# EAGLE board RedBot Accelerometer-Panel-v12a (EAGLE 7.4.0), part 1 of 8
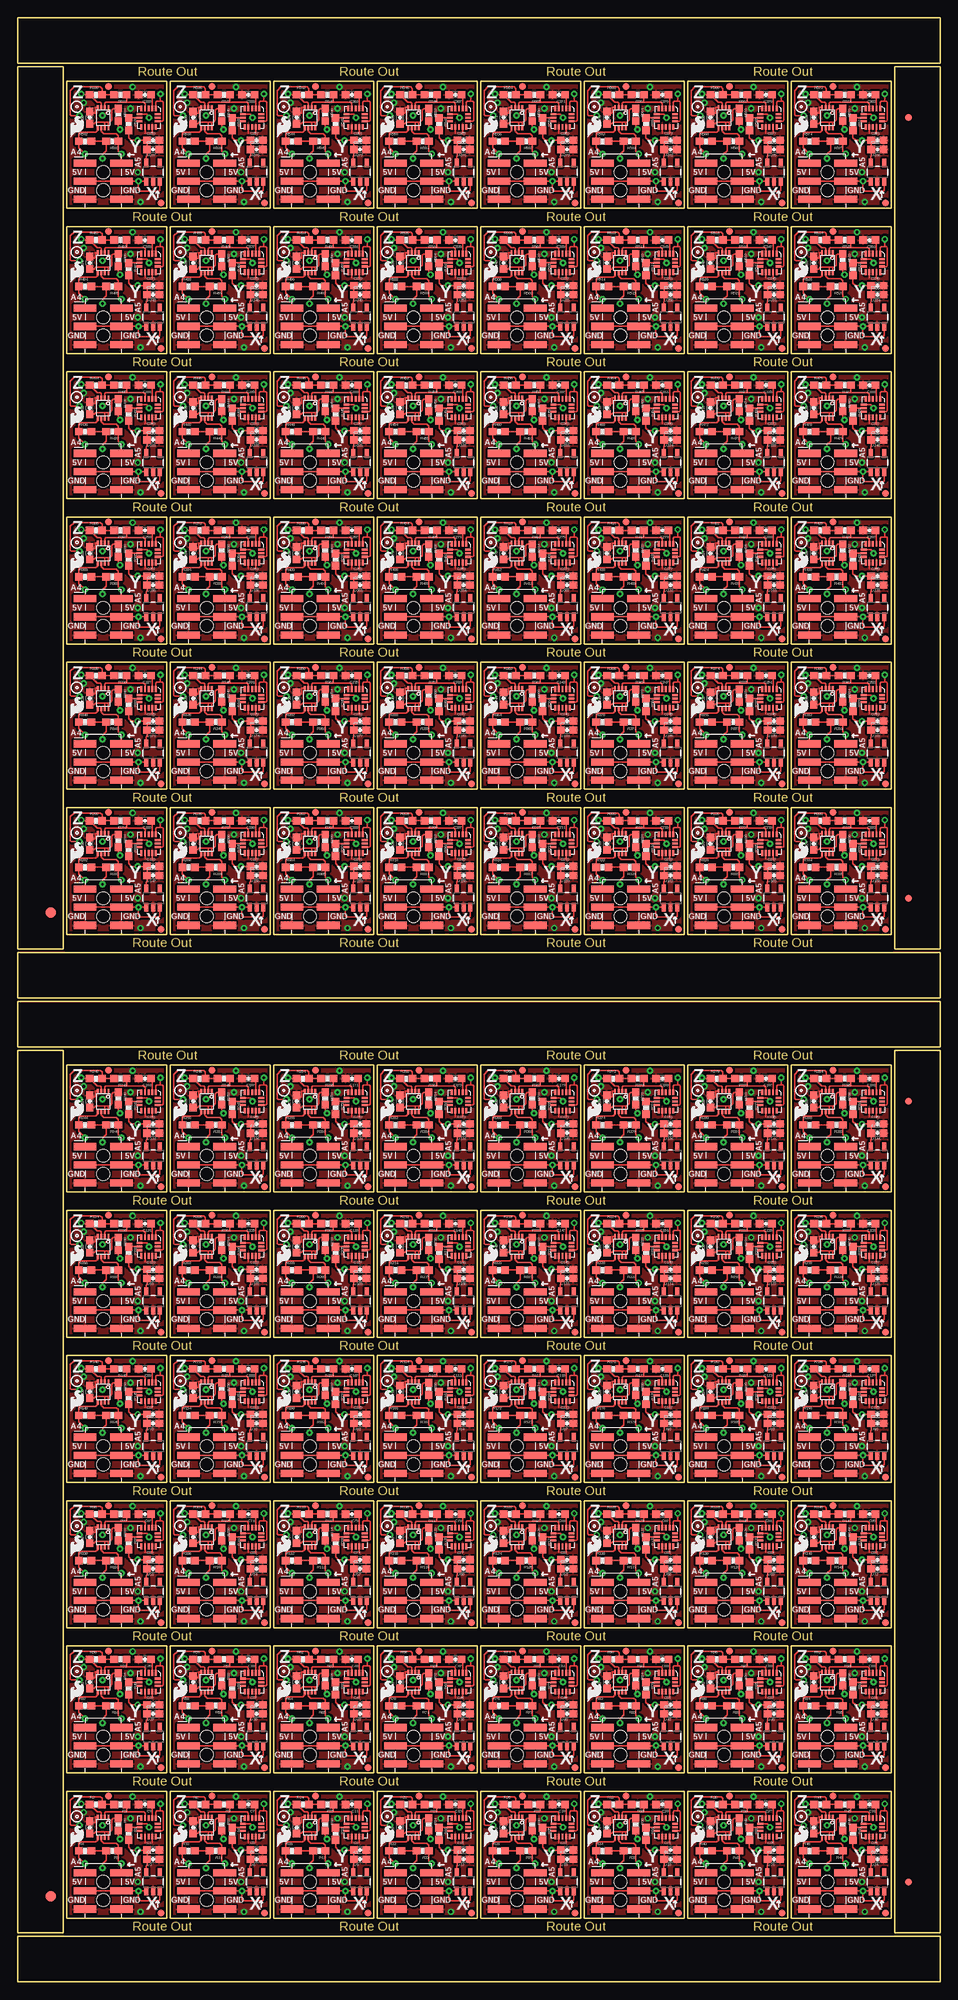
[diagram p0: board, top side]
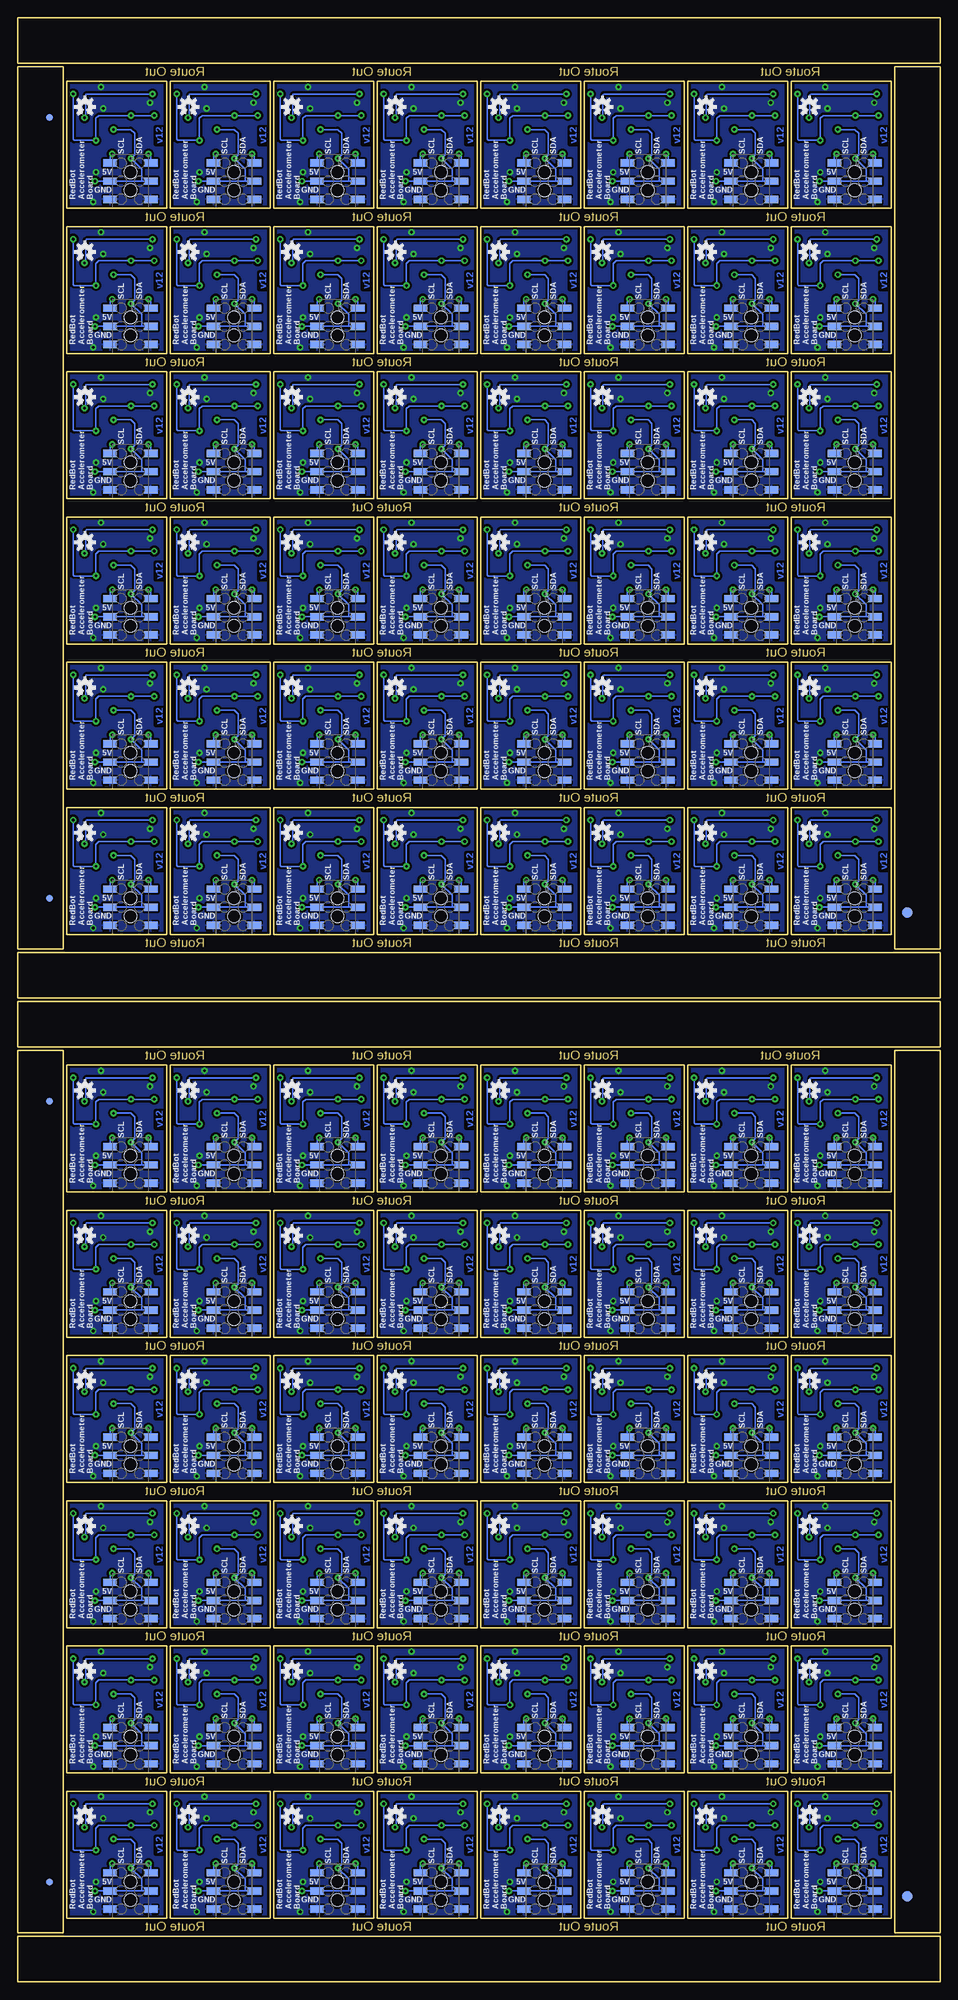
[diagram p1: board, bottom side, seen from below]

Size 129.03 x 274.83 mm. Coordinates in mm from the lower left corner, seen from the top.
Outline: 416 segments
Copper layers (1*16): Top 0.035mm / dielectric 1.5mm / Bottom 0.035mm
Design rules "SparkFun-2-layer": minimum track width 7mil, minimum drill 15mil, track to track 8mil, track to pad 8mil, pad to pad 8mil, via to via 8mil, smd to smd 8mil, copper to edge 8mil, drill to drill 8mil, minimum pad ring 12mil, minimum via ring 10mil, stop-mask expansion 4mil, vias tented up to drill 20mil, thermal gap 10mil

## Footprints (pad centres in the part's own frame; a part is rotated, then mirrored left to right if it is on the bottom)
0603-CAP = smd 1.1 x 1: 1 -0.85,0; 2 0.85,0
FIDUCIAL-1.5X3 = smd 1.5 x 1.5: 1 0,0
FIDUCIAL-1X2 = smd 1 x 1: 1 0,0
2X3_SMT_POSTS = smd 1 x 3.17: 1 -2.54,-2.54; 2 -2.54,2.54; 3 0,-2.54; 4 0,2.54; 5 2.54,-2.54; 6 2.54,2.54 | hole 1.8: -1.27,0; 1.27,0
2X3_SMD = smd 1.02 x 1.9: 1 -2.54,-2.85; 2 -2.54,2.85; 3 0,-2.85; 4 0,2.85; 5 2.54,-2.85; 6 2.54,2.85
0603-RES = smd 1.1 x 1: 1 -0.85,0; 2 0.85,0
MMA8452Q-1:1 = smd 0.8 x 0.275: 1 -1.3,1; 2 -1.3,0.5; 3 -1.3,0; 4 -1.3,-0.5; 5 -1.3,-1; 9 1.3,-1; 10 1.3,-0.5; 11 1.3,0; 12 1.3,0.5; 13 1.3,1 | smd 0.29 x 0.8: 6 -0.5,-1.275; 7 0,-1.275; 8 0.5,-1.275; 14 0.5,1.275; 15 0,1.275; 16 -0.5,1.275
SOT23-5 = smd 0.55 x 1.2: 1 -0.95,-1.3; 2 0,-1.3; 3 0.95,-1.3; 4 0.95,1.3; 5 -0.95,1.3
PCA9306DC-1:1 = smd 0.25 x 0.602: 1 -0.73,-1.446; 2 -0.23,-1.446; 3 0.27,-1.446; 4 0.77,-1.446; 5 0.77,1.431; 6 0.27,1.431; 7 -0.23,1.431; 8 -0.73,1.431

## Placement (x,y rotation side)
C1  0.1uF  [0603-CAP]  18.92,18.41 0 top
C2  4.7uF  [0603-CAP]  18.92,17.14 0 top
C3  0.1uF  [0603-CAP]  17.78,24.79 180 top
C4  0.1uF  [0603-CAP]  10.03,21.59 90 top
C5  0.1uF  [0603-CAP]  33.4,18.41 0 top
C6  4.7uF  [0603-CAP]  33.4,17.14 0 top
C7  0.1uF  [0603-CAP]  32.26,24.79 180 top
C8  0.1uF  [0603-CAP]  24.51,21.59 90 top
C9  0.1uF  [0603-CAP]  47.88,18.41 0 top
C10  4.7uF  [0603-CAP]  47.88,17.14 0 top
C11  0.1uF  [0603-CAP]  46.74,24.79 180 top
C12  0.1uF  [0603-CAP]  38.99,21.59 90 top
C13  0.1uF  [0603-CAP]  62.36,18.41 0 top
C14  4.7uF  [0603-CAP]  62.36,17.14 0 top
C15  0.1uF  [0603-CAP]  61.21,24.79 180 top
C16  0.1uF  [0603-CAP]  53.47,21.59 90 top
C17  0.1uF  [0603-CAP]  76.83,18.41 0 top
C18  4.7uF  [0603-CAP]  76.83,17.14 0 top
C19  0.1uF  [0603-CAP]  75.69,24.79 180 top
C20  0.1uF  [0603-CAP]  67.94,21.59 90 top
C21  0.1uF  [0603-CAP]  91.31,18.41 0 top
C22  4.7uF  [0603-CAP]  91.31,17.14 0 top
C23  0.1uF  [0603-CAP]  90.17,24.79 180 top
C24  0.1uF  [0603-CAP]  82.42,21.59 90 top
C25  0.1uF  [0603-CAP]  105.79,18.41 0 top
C26  4.7uF  [0603-CAP]  105.79,17.14 0 top
C27  0.1uF  [0603-CAP]  104.65,24.79 180 top
C28  0.1uF  [0603-CAP]  96.9,21.59 90 top
C29  0.1uF  [0603-CAP]  120.27,18.41 0 top
C30  4.7uF  [0603-CAP]  120.27,17.14 0 top
C31  0.1uF  [0603-CAP]  119.13,24.79 180 top
C32  0.1uF  [0603-CAP]  111.38,21.59 90 top
C33  0.1uF  [0603-CAP]  18.92,38.73 0 top
C34  4.7uF  [0603-CAP]  18.92,37.47 0 top
C35  0.1uF  [0603-CAP]  17.78,45.11 180 top
C36  0.1uF  [0603-CAP]  10.03,41.91 90 top
C37  0.1uF  [0603-CAP]  33.4,38.73 0 top
C38  4.7uF  [0603-CAP]  33.4,37.47 0 top
C39  0.1uF  [0603-CAP]  32.26,45.11 180 top
C40  0.1uF  [0603-CAP]  24.51,41.91 90 top
C41  0.1uF  [0603-CAP]  47.88,38.73 0 top
C42  4.7uF  [0603-CAP]  47.88,37.47 0 top
C43  0.1uF  [0603-CAP]  46.74,45.11 180 top
C44  0.1uF  [0603-CAP]  38.99,41.91 90 top
C45  0.1uF  [0603-CAP]  62.36,38.73 0 top
C46  4.7uF  [0603-CAP]  62.36,37.47 0 top
C47  0.1uF  [0603-CAP]  61.21,45.11 180 top
C48  0.1uF  [0603-CAP]  53.47,41.91 90 top
C49  0.1uF  [0603-CAP]  76.83,38.73 0 top
C50  4.7uF  [0603-CAP]  76.83,37.47 0 top
C51  0.1uF  [0603-CAP]  75.69,45.11 180 top
C52  0.1uF  [0603-CAP]  67.94,41.91 90 top
C53  0.1uF  [0603-CAP]  91.31,38.73 0 top
C54  4.7uF  [0603-CAP]  91.31,37.47 0 top
C55  0.1uF  [0603-CAP]  90.17,45.11 180 top
C56  0.1uF  [0603-CAP]  82.42,41.91 90 top
C57  0.1uF  [0603-CAP]  105.79,38.73 0 top
C58  4.7uF  [0603-CAP]  105.79,37.47 0 top
C59  0.1uF  [0603-CAP]  104.65,45.11 180 top
C60  0.1uF  [0603-CAP]  96.9,41.91 90 top
C61  0.1uF  [0603-CAP]  120.27,38.73 0 top
C62  4.7uF  [0603-CAP]  120.27,37.47 0 top
C63  0.1uF  [0603-CAP]  119.13,45.11 180 top
C64  0.1uF  [0603-CAP]  111.38,41.91 90 top
C65  0.1uF  [0603-CAP]  18.92,59.05 0 top
C66  4.7uF  [0603-CAP]  18.92,57.78 0 top
C67  0.1uF  [0603-CAP]  17.78,65.43 180 top
C68  0.1uF  [0603-CAP]  10.03,62.23 90 top
C69  0.1uF  [0603-CAP]  33.4,59.05 0 top
C70  4.7uF  [0603-CAP]  33.4,57.78 0 top
C71  0.1uF  [0603-CAP]  32.26,65.43 180 top
C72  0.1uF  [0603-CAP]  24.51,62.23 90 top
C73  0.1uF  [0603-CAP]  47.88,59.05 0 top
C74  4.7uF  [0603-CAP]  47.88,57.78 0 top
C75  0.1uF  [0603-CAP]  46.74,65.43 180 top
C76  0.1uF  [0603-CAP]  38.99,62.23 90 top
C77  0.1uF  [0603-CAP]  62.36,59.05 0 top
C78  4.7uF  [0603-CAP]  62.36,57.78 0 top
C79  0.1uF  [0603-CAP]  61.21,65.43 180 top
C80  0.1uF  [0603-CAP]  53.47,62.23 90 top
C81  0.1uF  [0603-CAP]  76.83,59.05 0 top
C82  4.7uF  [0603-CAP]  76.83,57.78 0 top
C83  0.1uF  [0603-CAP]  75.69,65.43 180 top
C84  0.1uF  [0603-CAP]  67.94,62.23 90 top
C85  0.1uF  [0603-CAP]  91.31,59.05 0 top
C86  4.7uF  [0603-CAP]  91.31,57.78 0 top
C87  0.1uF  [0603-CAP]  90.17,65.43 180 top
C88  0.1uF  [0603-CAP]  82.42,62.23 90 top
C89  0.1uF  [0603-CAP]  105.79,59.05 0 top
C90  4.7uF  [0603-CAP]  105.79,57.78 0 top
C91  0.1uF  [0603-CAP]  104.65,65.43 180 top
C92  0.1uF  [0603-CAP]  96.9,62.23 90 top
C93  0.1uF  [0603-CAP]  120.27,59.05 0 top
C94  4.7uF  [0603-CAP]  120.27,57.78 0 top
C95  0.1uF  [0603-CAP]  119.13,65.43 180 top
C96  0.1uF  [0603-CAP]  111.38,62.23 90 top
C97  0.1uF  [0603-CAP]  18.92,79.38 0 top
C98  4.7uF  [0603-CAP]  18.92,78.11 0 top
C99  0.1uF  [0603-CAP]  17.78,85.75 180 top
C100  0.1uF  [0603-CAP]  10.03,82.55 90 top
C101  0.1uF  [0603-CAP]  33.4,79.38 0 top
C102  4.7uF  [0603-CAP]  33.4,78.11 0 top
C103  0.1uF  [0603-CAP]  32.26,85.75 180 top
C104  0.1uF  [0603-CAP]  24.51,82.55 90 top
C105  0.1uF  [0603-CAP]  47.88,79.38 0 top
C106  4.7uF  [0603-CAP]  47.88,78.11 0 top
C107  0.1uF  [0603-CAP]  46.74,85.75 180 top
C108  0.1uF  [0603-CAP]  38.99,82.55 90 top
C109  0.1uF  [0603-CAP]  62.36,79.38 0 top
C110  4.7uF  [0603-CAP]  62.36,78.11 0 top
C111  0.1uF  [0603-CAP]  61.21,85.75 180 top
C112  0.1uF  [0603-CAP]  53.47,82.55 90 top
C113  0.1uF  [0603-CAP]  76.83,79.38 0 top
C114  4.7uF  [0603-CAP]  76.83,78.11 0 top
C115  0.1uF  [0603-CAP]  75.69,85.75 180 top
C116  0.1uF  [0603-CAP]  67.94,82.55 90 top
C117  0.1uF  [0603-CAP]  91.31,79.38 0 top
C118  4.7uF  [0603-CAP]  91.31,78.11 0 top
C119  0.1uF  [0603-CAP]  90.17,85.75 180 top
C120  0.1uF  [0603-CAP]  82.42,82.55 90 top
C121  0.1uF  [0603-CAP]  105.79,79.38 0 top
C122  4.7uF  [0603-CAP]  105.79,78.11 0 top
C123  0.1uF  [0603-CAP]  104.65,85.75 180 top
C124  0.1uF  [0603-CAP]  96.9,82.55 90 top
C125  0.1uF  [0603-CAP]  120.27,79.38 0 top
C126  4.7uF  [0603-CAP]  120.27,78.11 0 top
C127  0.1uF  [0603-CAP]  119.13,85.75 180 top
C128  0.1uF  [0603-CAP]  111.38,82.55 90 top
C129  0.1uF  [0603-CAP]  18.92,99.69 0 top
C130  4.7uF  [0603-CAP]  18.92,98.42 0 top
C131  0.1uF  [0603-CAP]  17.78,106.07 180 top
C132  0.1uF  [0603-CAP]  10.03,102.87 90 top
C133  0.1uF  [0603-CAP]  33.4,99.69 0 top
C134  4.7uF  [0603-CAP]  33.4,98.42 0 top
C135  0.1uF  [0603-CAP]  32.26,106.07 180 top
C136  0.1uF  [0603-CAP]  24.51,102.87 90 top
C137  0.1uF  [0603-CAP]  47.88,99.69 0 top
C138  4.7uF  [0603-CAP]  47.88,98.42 0 top
C139  0.1uF  [0603-CAP]  46.74,106.07 180 top
C140  0.1uF  [0603-CAP]  38.99,102.87 90 top
C141  0.1uF  [0603-CAP]  62.36,99.69 0 top
C142  4.7uF  [0603-CAP]  62.36,98.42 0 top
C143  0.1uF  [0603-CAP]  61.21,106.07 180 top
C144  0.1uF  [0603-CAP]  53.47,102.87 90 top
C145  0.1uF  [0603-CAP]  76.83,99.69 0 top
C146  4.7uF  [0603-CAP]  76.83,98.42 0 top
C147  0.1uF  [0603-CAP]  75.69,106.07 180 top
C148  0.1uF  [0603-CAP]  67.94,102.87 90 top
C149  0.1uF  [0603-CAP]  91.31,99.69 0 top
C150  4.7uF  [0603-CAP]  91.31,98.42 0 top
C151  0.1uF  [0603-CAP]  90.17,106.07 180 top
C152  0.1uF  [0603-CAP]  82.42,102.87 90 top
C153  0.1uF  [0603-CAP]  105.79,99.69 0 top
C154  4.7uF  [0603-CAP]  105.79,98.42 0 top
C155  0.1uF  [0603-CAP]  104.65,106.07 180 top
C156  0.1uF  [0603-CAP]  96.9,102.87 90 top
C157  0.1uF  [0603-CAP]  120.27,99.69 0 top
C158  4.7uF  [0603-CAP]  120.27,98.42 0 top
C159  0.1uF  [0603-CAP]  119.13,106.07 180 top
C160  0.1uF  [0603-CAP]  111.38,102.87 90 top
C161  0.1uF  [0603-CAP]  18.92,120.02 0 top
C162  4.7uF  [0603-CAP]  18.92,118.75 0 top
C163  0.1uF  [0603-CAP]  17.78,126.39 180 top
C164  0.1uF  [0603-CAP]  10.03,123.19 90 top
C165  0.1uF  [0603-CAP]  33.4,120.02 0 top
C166  4.7uF  [0603-CAP]  33.4,118.75 0 top
C167  0.1uF  [0603-CAP]  32.26,126.39 180 top
C168  0.1uF  [0603-CAP]  24.51,123.19 90 top
C169  0.1uF  [0603-CAP]  47.88,120.02 0 top
C170  4.7uF  [0603-CAP]  47.88,118.75 0 top
C171  0.1uF  [0603-CAP]  46.74,126.39 180 top
C172  0.1uF  [0603-CAP]  38.99,123.19 90 top
C173  0.1uF  [0603-CAP]  62.36,120.02 0 top
C174  4.7uF  [0603-CAP]  62.36,118.75 0 top
C175  0.1uF  [0603-CAP]  61.21,126.39 180 top
C176  0.1uF  [0603-CAP]  53.47,123.19 90 top
C177  0.1uF  [0603-CAP]  76.83,120.02 0 top
C178  4.7uF  [0603-CAP]  76.83,118.75 0 top
C179  0.1uF  [0603-CAP]  75.69,126.39 180 top
C180  0.1uF  [0603-CAP]  67.94,123.19 90 top
C181  0.1uF  [0603-CAP]  91.31,120.02 0 top
C182  4.7uF  [0603-CAP]  91.31,118.75 0 top
C183  0.1uF  [0603-CAP]  90.17,126.39 180 top
C184  0.1uF  [0603-CAP]  82.42,123.19 90 top
C185  0.1uF  [0603-CAP]  105.79,120.02 0 top
C186  4.7uF  [0603-CAP]  105.79,118.75 0 top
C187  0.1uF  [0603-CAP]  104.65,126.39 180 top
C188  0.1uF  [0603-CAP]  96.9,123.19 90 top
C189  0.1uF  [0603-CAP]  120.27,120.02 0 top
C190  4.7uF  [0603-CAP]  120.27,118.75 0 top
C191  0.1uF  [0603-CAP]  119.13,126.39 180 top
C192  0.1uF  [0603-CAP]  111.38,123.19 90 top
C193  0.1uF  [0603-CAP]  18.92,156.08 0 top
C194  4.7uF  [0603-CAP]  18.92,154.81 0 top
C195  0.1uF  [0603-CAP]  17.78,162.46 180 top
C196  0.1uF  [0603-CAP]  10.03,159.26 90 top
C197  0.1uF  [0603-CAP]  33.4,156.08 0 top
C198  4.7uF  [0603-CAP]  33.4,154.81 0 top
C199  0.1uF  [0603-CAP]  32.26,162.46 180 top
C200  0.1uF  [0603-CAP]  24.51,159.26 90 top
C201  0.1uF  [0603-CAP]  47.88,156.08 0 top
C202  4.7uF  [0603-CAP]  47.88,154.81 0 top
C203  0.1uF  [0603-CAP]  46.74,162.46 180 top
C204  0.1uF  [0603-CAP]  38.99,159.26 90 top
C205  0.1uF  [0603-CAP]  62.36,156.08 0 top
C206  4.7uF  [0603-CAP]  62.36,154.81 0 top
C207  0.1uF  [0603-CAP]  61.21,162.46 180 top
C208  0.1uF  [0603-CAP]  53.47,159.26 90 top
C209  0.1uF  [0603-CAP]  76.83,156.08 0 top
C210  4.7uF  [0603-CAP]  76.83,154.81 0 top
C211  0.1uF  [0603-CAP]  75.69,162.46 180 top
C212  0.1uF  [0603-CAP]  67.94,159.26 90 top
C213  0.1uF  [0603-CAP]  91.31,156.08 0 top
C214  4.7uF  [0603-CAP]  91.31,154.81 0 top
C215  0.1uF  [0603-CAP]  90.17,162.46 180 top
C216  0.1uF  [0603-CAP]  82.42,159.26 90 top
C217  0.1uF  [0603-CAP]  105.79,156.08 0 top
C218  4.7uF  [0603-CAP]  105.79,154.81 0 top
C219  0.1uF  [0603-CAP]  104.65,162.46 180 top
C220  0.1uF  [0603-CAP]  96.9,159.26 90 top
C221  0.1uF  [0603-CAP]  120.27,156.08 0 top
C222  4.7uF  [0603-CAP]  120.27,154.81 0 top
C223  0.1uF  [0603-CAP]  119.13,162.46 180 top
C224  0.1uF  [0603-CAP]  111.38,159.26 90 top
C225  0.1uF  [0603-CAP]  18.92,176.4 0 top
C226  4.7uF  [0603-CAP]  18.92,175.13 0 top
C227  0.1uF  [0603-CAP]  17.78,182.78 180 top
C228  0.1uF  [0603-CAP]  10.03,179.58 90 top
C229  0.1uF  [0603-CAP]  33.4,176.4 0 top
C230  4.7uF  [0603-CAP]  33.4,175.13 0 top
C231  0.1uF  [0603-CAP]  32.26,182.78 180 top
C232  0.1uF  [0603-CAP]  24.51,179.58 90 top
C233  0.1uF  [0603-CAP]  47.88,176.4 0 top
C234  4.7uF  [0603-CAP]  47.88,175.13 0 top
C235  0.1uF  [0603-CAP]  46.74,182.78 180 top
C236  0.1uF  [0603-CAP]  38.99,179.58 90 top
C237  0.1uF  [0603-CAP]  62.36,176.4 0 top
C238  4.7uF  [0603-CAP]  62.36,175.13 0 top
C239  0.1uF  [0603-CAP]  61.21,182.78 180 top
C240  0.1uF  [0603-CAP]  53.47,179.58 90 top
C241  0.1uF  [0603-CAP]  76.83,176.4 0 top
C242  4.7uF  [0603-CAP]  76.83,175.13 0 top
C243  0.1uF  [0603-CAP]  75.69,182.78 180 top
C244  0.1uF  [0603-CAP]  67.94,179.58 90 top
C245  0.1uF  [0603-CAP]  91.31,176.4 0 top
C246  4.7uF  [0603-CAP]  91.31,175.13 0 top
C247  0.1uF  [0603-CAP]  90.17,182.78 180 top
C248  0.1uF  [0603-CAP]  82.42,179.58 90 top
C249  0.1uF  [0603-CAP]  105.79,176.4 0 top
C250  4.7uF  [0603-CAP]  105.79,175.13 0 top
C251  0.1uF  [0603-CAP]  104.65,182.78 180 top
C252  0.1uF  [0603-CAP]  96.9,179.58 90 top
C253  0.1uF  [0603-CAP]  120.27,176.4 0 top
C254  4.7uF  [0603-CAP]  120.27,175.13 0 top
C255  0.1uF  [0603-CAP]  119.13,182.78 180 top
C256  0.1uF  [0603-CAP]  111.38,179.58 90 top
C257  0.1uF  [0603-CAP]  18.92,196.72 0 top
C258  4.7uF  [0603-CAP]  18.92,195.45 0 top
C259  0.1uF  [0603-CAP]  17.78,203.1 180 top
C260  0.1uF  [0603-CAP]  10.03,199.9 90 top
C261  0.1uF  [0603-CAP]  33.4,196.72 0 top
C262  4.7uF  [0603-CAP]  33.4,195.45 0 top
C263  0.1uF  [0603-CAP]  32.26,203.1 180 top
C264  0.1uF  [0603-CAP]  24.51,199.9 90 top
C265  0.1uF  [0603-CAP]  47.88,196.72 0 top
C266  4.7uF  [0603-CAP]  47.88,195.45 0 top
C267  0.1uF  [0603-CAP]  46.74,203.1 180 top
C268  0.1uF  [0603-CAP]  38.99,199.9 90 top
C269  0.1uF  [0603-CAP]  62.36,196.72 0 top
C270  4.7uF  [0603-CAP]  62.36,195.45 0 top
C271  0.1uF  [0603-CAP]  61.21,203.1 180 top
C272  0.1uF  [0603-CAP]  53.47,199.9 90 top
C273  0.1uF  [0603-CAP]  76.83,196.72 0 top
C274  4.7uF  [0603-CAP]  76.83,195.45 0 top
C275  0.1uF  [0603-CAP]  75.69,203.1 180 top
C276  0.1uF  [0603-CAP]  67.94,199.9 90 top
C277  0.1uF  [0603-CAP]  91.31,196.72 0 top
C278  4.7uF  [0603-CAP]  91.31,195.45 0 top
C279  0.1uF  [0603-CAP]  90.17,203.1 180 top
C280  0.1uF  [0603-CAP]  82.42,199.9 90 top
C281  0.1uF  [0603-CAP]  105.79,196.72 0 top
C282  4.7uF  [0603-CAP]  105.79,195.45 0 top
C283  0.1uF  [0603-CAP]  104.65,203.1 180 top
C284  0.1uF  [0603-CAP]  96.9,199.9 90 top
C285  0.1uF  [0603-CAP]  120.27,196.72 0 top
C286  4.7uF  [0603-CAP]  120.27,195.45 0 top
C287  0.1uF  [0603-CAP]  119.13,203.1 180 top
C288  0.1uF  [0603-CAP]  111.38,199.9 90 top
C289  0.1uF  [0603-CAP]  18.92,217.04 0 top
C290  4.7uF  [0603-CAP]  18.92,215.77 0 top
C291  0.1uF  [0603-CAP]  17.78,223.42 180 top
C292  0.1uF  [0603-CAP]  10.03,220.22 90 top
C293  0.1uF  [0603-CAP]  33.4,217.04 0 top
C294  4.7uF  [0603-CAP]  33.4,215.77 0 top
C295  0.1uF  [0603-CAP]  32.26,223.42 180 top
C296  0.1uF  [0603-CAP]  24.51,220.22 90 top
C297  0.1uF  [0603-CAP]  47.88,217.04 0 top
C298  4.7uF  [0603-CAP]  47.88,215.77 0 top
C299  0.1uF  [0603-CAP]  46.74,223.42 180 top
C300  0.1uF  [0603-CAP]  38.99,220.22 90 top
C301  0.1uF  [0603-CAP]  62.36,217.04 0 top
C302  4.7uF  [0603-CAP]  62.36,215.77 0 top
C303  0.1uF  [0603-CAP]  61.21,223.42 180 top
C304  0.1uF  [0603-CAP]  53.47,220.22 90 top
C305  0.1uF  [0603-CAP]  76.83,217.04 0 top
C306  4.7uF  [0603-CAP]  76.83,215.77 0 top
C307  0.1uF  [0603-CAP]  75.69,223.42 180 top
C308  0.1uF  [0603-CAP]  67.94,220.22 90 top
C309  0.1uF  [0603-CAP]  91.31,217.04 0 top
C310  4.7uF  [0603-CAP]  91.31,215.77 0 top
C311  0.1uF  [0603-CAP]  90.17,223.42 180 top
C312  0.1uF  [0603-CAP]  82.42,220.22 90 top
C313  0.1uF  [0603-CAP]  105.79,217.04 0 top
C314  4.7uF  [0603-CAP]  105.79,215.77 0 top
C315  0.1uF  [0603-CAP]  104.65,223.42 180 top
C316  0.1uF  [0603-CAP]  96.9,220.22 90 top
C317  0.1uF  [0603-CAP]  120.27,217.04 0 top
C318  4.7uF  [0603-CAP]  120.27,215.77 0 top
C319  0.1uF  [0603-CAP]  119.13,223.42 180 top
C320  0.1uF  [0603-CAP]  111.38,220.22 90 top
C321  0.1uF  [0603-CAP]  18.92,237.36 0 top
C322  4.7uF  [0603-CAP]  18.92,236.09 0 top
C323  0.1uF  [0603-CAP]  17.78,243.74 180 top
C324  0.1uF  [0603-CAP]  10.03,240.54 90 top
C325  0.1uF  [0603-CAP]  33.4,237.36 0 top
C326  4.7uF  [0603-CAP]  33.4,236.09 0 top
C327  0.1uF  [0603-CAP]  32.26,243.74 180 top
C328  0.1uF  [0603-CAP]  24.51,240.54 90 top
C329  0.1uF  [0603-CAP]  47.88,237.36 0 top
C330  4.7uF  [0603-CAP]  47.88,236.09 0 top
C331  0.1uF  [0603-CAP]  46.74,243.74 180 top
C332  0.1uF  [0603-CAP]  38.99,240.54 90 top
C333  0.1uF  [0603-CAP]  62.36,237.36 0 top
C334  4.7uF  [0603-CAP]  62.36,236.09 0 top
C335  0.1uF  [0603-CAP]  61.21,243.74 180 top
C336  0.1uF  [0603-CAP]  53.47,240.54 90 top
C337  0.1uF  [0603-CAP]  76.83,237.36 0 top
C338  4.7uF  [0603-CAP]  76.83,236.09 0 top
C339  0.1uF  [0603-CAP]  75.69,243.74 180 top
C340  0.1uF  [0603-CAP]  67.94,240.54 90 top
C341  0.1uF  [0603-CAP]  91.31,237.36 0 top
C342  4.7uF  [0603-CAP]  91.31,236.09 0 top
C343  0.1uF  [0603-CAP]  90.17,243.74 180 top
C344  0.1uF  [0603-CAP]  82.42,240.54 90 top
C345  0.1uF  [0603-CAP]  105.79,237.36 0 top
C346  4.7uF  [0603-CAP]  105.79,236.09 0 top
C347  0.1uF  [0603-CAP]  104.65,243.74 180 top
C348  0.1uF  [0603-CAP]  96.9,240.54 90 top
C349  0.1uF  [0603-CAP]  120.27,237.36 0 top
C350  4.7uF  [0603-CAP]  120.27,236.09 0 top
C351  0.1uF  [0603-CAP]  119.13,243.74 180 top
C352  0.1uF  [0603-CAP]  111.38,240.54 90 top
C353  0.1uF  [0603-CAP]  18.92,257.68 0 top
C354  4.7uF  [0603-CAP]  18.92,256.41 0 top
C355  0.1uF  [0603-CAP]  17.78,264.06 180 top
C356  0.1uF  [0603-CAP]  10.03,260.86 90 top
C357  0.1uF  [0603-CAP]  33.4,257.68 0 top
C358  4.7uF  [0603-CAP]  33.4,256.41 0 top
C359  0.1uF  [0603-CAP]  32.26,264.06 180 top
C360  0.1uF  [0603-CAP]  24.51,260.86 90 top
C361  0.1uF  [0603-CAP]  47.88,257.68 0 top
C362  4.7uF  [0603-CAP]  47.88,256.41 0 top
C363  0.1uF  [0603-CAP]  46.74,264.06 180 top
C364  0.1uF  [0603-CAP]  38.99,260.86 90 top
C365  0.1uF  [0603-CAP]  62.36,257.68 0 top
C366  4.7uF  [0603-CAP]  62.36,256.41 0 top
C367  0.1uF  [0603-CAP]  61.21,264.06 180 top
C368  0.1uF  [0603-CAP]  53.47,260.86 90 top
C369  0.1uF  [0603-CAP]  76.83,257.68 0 top
C370  4.7uF  [0603-CAP]  76.83,256.41 0 top
C371  0.1uF  [0603-CAP]  75.69,264.06 180 top
C372  0.1uF  [0603-CAP]  67.94,260.86 90 top
C373  0.1uF  [0603-CAP]  91.31,257.68 0 top
C374  4.7uF  [0603-CAP]  91.31,256.41 0 top
C375  0.1uF  [0603-CAP]  90.17,264.06 180 top
C376  0.1uF  [0603-CAP]  82.42,260.86 90 top
C377  0.1uF  [0603-CAP]  105.79,257.68 0 top
C378  4.7uF  [0603-CAP]  105.79,256.41 0 top
C379  0.1uF  [0603-CAP]  104.65,264.06 180 top
C380  0.1uF  [0603-CAP]  96.9,260.86 90 top
C381  0.1uF  [0603-CAP]  120.27,257.68 0 top
C382  4.7uF  [0603-CAP]  120.27,256.41 0 top
C383  0.1uF  [0603-CAP]  119.13,264.06 180 top
C384  0.1uF  [0603-CAP]  111.38,260.86 90 top
E$1  [FIDUCIAL-1.5X3]  4.57,11.94 0 top
E$2  [FIDUCIAL-1X2]  124.59,13.97 0 top
E$3  [FIDUCIAL-1X2]  124.59,123.19 180 top
E$4  [FIDUCIAL-1X2]  124.59,151.64 0 top
E$5  [FIDUCIAL-1X2]  124.59,260.86 180 top
E$6  [FIDUCIAL-1.5X3]  4.57,149.61 0 top
E$7  [FIDUCIAL-1.5X3]  4.57,11.94 0 bottom
E$8  [FIDUCIAL-1X2]  124.59,13.97 0 bottom
E$9  [FIDUCIAL-1X2]  124.59,123.19 180 bottom
E$10  [FIDUCIAL-1X2]  124.59,151.64 0 bottom
E$11  [FIDUCIAL-1.5X3]  4.57,149.61 0 bottom
E$12  [FIDUCIAL-1X2]  124.59,260.86 180 bottom
FID1  FIDUCIAL1X2  [FIDUCIAL-1X2]  12.67,25.96 0 top
FID2  FIDUCIAL1X2  [FIDUCIAL-1X2]  34.52,9.63 0 top
FID3  FIDUCIAL1X2  [FIDUCIAL-1X2]  20.04,9.63 0 top
FID4  FIDUCIAL1X2  [FIDUCIAL-1X2]  27.15,25.96 0 top
FID5  FIDUCIAL1X2  [FIDUCIAL-1X2]  49,9.63 0 top
FID6  FIDUCIAL1X2  [FIDUCIAL-1X2]  41.63,25.96 0 top
FID7  FIDUCIAL1X2  [FIDUCIAL-1X2]  63.47,9.63 0 top
FID8  FIDUCIAL1X2  [FIDUCIAL-1X2]  56.11,25.96 0 top
FID9  FIDUCIAL1X2  [FIDUCIAL-1X2]  77.95,9.63 0 top
FID10  FIDUCIAL1X2  [FIDUCIAL-1X2]  70.59,25.96 0 top
FID11  FIDUCIAL1X2  [FIDUCIAL-1X2]  92.43,9.63 0 top
FID12  FIDUCIAL1X2  [FIDUCIAL-1X2]  85.06,25.96 0 top
FID13  FIDUCIAL1X2  [FIDUCIAL-1X2]  106.91,9.63 0 top
FID14  FIDUCIAL1X2  [FIDUCIAL-1X2]  99.54,25.96 0 top
FID15  FIDUCIAL1X2  [FIDUCIAL-1X2]  121.39,9.63 0 top
FID16  FIDUCIAL1X2  [FIDUCIAL-1X2]  114.02,25.96 0 top
FID17  FIDUCIAL1X2  [FIDUCIAL-1X2]  20.04,29.95 0 top
FID18  FIDUCIAL1X2  [FIDUCIAL-1X2]  12.67,46.28 0 top
FID19  FIDUCIAL1X2  [FIDUCIAL-1X2]  34.52,29.95 0 top
FID20  FIDUCIAL1X2  [FIDUCIAL-1X2]  27.15,46.28 0 top
FID21  FIDUCIAL1X2  [FIDUCIAL-1X2]  49,29.95 0 top
FID22  FIDUCIAL1X2  [FIDUCIAL-1X2]  41.63,46.28 0 top
FID23  FIDUCIAL1X2  [FIDUCIAL-1X2]  63.47,29.95 0 top
FID24  FIDUCIAL1X2  [FIDUCIAL-1X2]  56.11,46.28 0 top
FID25  FIDUCIAL1X2  [FIDUCIAL-1X2]  77.95,29.95 0 top
FID26  FIDUCIAL1X2  [FIDUCIAL-1X2]  70.59,46.28 0 top
FID27  FIDUCIAL1X2  [FIDUCIAL-1X2]  92.43,29.95 0 top
FID28  FIDUCIAL1X2  [FIDUCIAL-1X2]  85.06,46.28 0 top
FID29  FIDUCIAL1X2  [FIDUCIAL-1X2]  106.91,29.95 0 top
FID30  FIDUCIAL1X2  [FIDUCIAL-1X2]  99.54,46.28 0 top
FID31  FIDUCIAL1X2  [FIDUCIAL-1X2]  121.39,29.95 0 top
FID32  FIDUCIAL1X2  [FIDUCIAL-1X2]  114.02,46.28 0 top
FID33  FIDUCIAL1X2  [FIDUCIAL-1X2]  20.04,50.27 0 top
FID34  FIDUCIAL1X2  [FIDUCIAL-1X2]  12.67,66.6 0 top
FID35  FIDUCIAL1X2  [FIDUCIAL-1X2]  34.52,50.27 0 top
FID36  FIDUCIAL1X2  [FIDUCIAL-1X2]  27.15,66.6 0 top
FID37  FIDUCIAL1X2  [FIDUCIAL-1X2]  49,50.27 0 top
FID38  FIDUCIAL1X2  [FIDUCIAL-1X2]  41.63,66.6 0 top
FID39  FIDUCIAL1X2  [FIDUCIAL-1X2]  63.47,50.27 0 top
FID40  FIDUCIAL1X2  [FIDUCIAL-1X2]  56.11,66.6 0 top
FID41  FIDUCIAL1X2  [FIDUCIAL-1X2]  77.95,50.27 0 top
FID42  FIDUCIAL1X2  [FIDUCIAL-1X2]  70.59,66.6 0 top
FID43  FIDUCIAL1X2  [FIDUCIAL-1X2]  92.43,50.27 0 top
FID44  FIDUCIAL1X2  [FIDUCIAL-1X2]  85.06,66.6 0 top
FID45  FIDUCIAL1X2  [FIDUCIAL-1X2]  106.91,50.27 0 top
FID46  FIDUCIAL1X2  [FIDUCIAL-1X2]  99.54,66.6 0 top
FID47  FIDUCIAL1X2  [FIDUCIAL-1X2]  121.39,50.27 0 top
FID48  FIDUCIAL1X2  [FIDUCIAL-1X2]  114.02,66.6 0 top
FID49  FIDUCIAL1X2  [FIDUCIAL-1X2]  20.04,70.59 0 top
FID50  FIDUCIAL1X2  [FIDUCIAL-1X2]  12.67,86.92 0 top
FID51  FIDUCIAL1X2  [FIDUCIAL-1X2]  34.52,70.59 0 top
FID52  FIDUCIAL1X2  [FIDUCIAL-1X2]  27.15,86.92 0 top
FID53  FIDUCIAL1X2  [FIDUCIAL-1X2]  49,70.59 0 top
FID54  FIDUCIAL1X2  [FIDUCIAL-1X2]  41.63,86.92 0 top
FID55  FIDUCIAL1X2  [FIDUCIAL-1X2]  63.47,70.59 0 top
FID56  FIDUCIAL1X2  [FIDUCIAL-1X2]  56.11,86.92 0 top
FID57  FIDUCIAL1X2  [FIDUCIAL-1X2]  77.95,70.59 0 top
FID58  FIDUCIAL1X2  [FIDUCIAL-1X2]  70.59,86.92 0 top
FID59  FIDUCIAL1X2  [FIDUCIAL-1X2]  92.43,70.59 0 top
FID60  FIDUCIAL1X2  [FIDUCIAL-1X2]  85.06,86.92 0 top
FID61  FIDUCIAL1X2  [FIDUCIAL-1X2]  106.91,70.59 0 top
FID62  FIDUCIAL1X2  [FIDUCIAL-1X2]  99.54,86.92 0 top
FID63  FIDUCIAL1X2  [FIDUCIAL-1X2]  121.39,70.59 0 top
FID64  FIDUCIAL1X2  [FIDUCIAL-1X2]  114.02,86.92 0 top
FID65  FIDUCIAL1X2  [FIDUCIAL-1X2]  20.04,90.91 0 top
FID66  FIDUCIAL1X2  [FIDUCIAL-1X2]  12.67,107.24 0 top
FID67  FIDUCIAL1X2  [FIDUCIAL-1X2]  34.52,90.91 0 top
FID68  FIDUCIAL1X2  [FIDUCIAL-1X2]  27.15,107.24 0 top
FID69  FIDUCIAL1X2  [FIDUCIAL-1X2]  49,90.91 0 top
FID70  FIDUCIAL1X2  [FIDUCIAL-1X2]  41.63,107.24 0 top
FID71  FIDUCIAL1X2  [FIDUCIAL-1X2]  63.47,90.91 0 top
FID72  FIDUCIAL1X2  [FIDUCIAL-1X2]  56.11,107.24 0 top
FID73  FIDUCIAL1X2  [FIDUCIAL-1X2]  77.95,90.91 0 top
FID74  FIDUCIAL1X2  [FIDUCIAL-1X2]  70.59,107.24 0 top
FID75  FIDUCIAL1X2  [FIDUCIAL-1X2]  92.43,90.91 0 top
FID76  FIDUCIAL1X2  [FIDUCIAL-1X2]  85.06,107.24 0 top
FID77  FIDUCIAL1X2  [FIDUCIAL-1X2]  106.91,90.91 0 top
FID78  FIDUCIAL1X2  [FIDUCIAL-1X2]  99.54,107.24 0 top
FID79  FIDUCIAL1X2  [FIDUCIAL-1X2]  121.39,90.91 0 top
FID80  FIDUCIAL1X2  [FIDUCIAL-1X2]  114.02,107.24 0 top
FID81  FIDUCIAL1X2  [FIDUCIAL-1X2]  20.04,111.23 0 top
FID82  FIDUCIAL1X2  [FIDUCIAL-1X2]  12.67,127.56 0 top
FID83  FIDUCIAL1X2  [FIDUCIAL-1X2]  34.52,111.23 0 top
FID84  FIDUCIAL1X2  [FIDUCIAL-1X2]  27.15,127.56 0 top
FID85  FIDUCIAL1X2  [FIDUCIAL-1X2]  49,111.23 0 top
FID86  FIDUCIAL1X2  [FIDUCIAL-1X2]  41.63,127.56 0 top
FID87  FIDUCIAL1X2  [FIDUCIAL-1X2]  63.47,111.23 0 top
FID88  FIDUCIAL1X2  [FIDUCIAL-1X2]  56.11,127.56 0 top
FID89  FIDUCIAL1X2  [FIDUCIAL-1X2]  77.95,111.23 0 top
FID90  FIDUCIAL1X2  [FIDUCIAL-1X2]  70.59,127.56 0 top
FID91  FIDUCIAL1X2  [FIDUCIAL-1X2]  92.43,111.23 0 top
FID92  FIDUCIAL1X2  [FIDUCIAL-1X2]  85.06,127.56 0 top
FID93  FIDUCIAL1X2  [FIDUCIAL-1X2]  106.91,111.23 0 top
FID94  FIDUCIAL1X2  [FIDUCIAL-1X2]  99.54,127.56 0 top
FID95  FIDUCIAL1X2  [FIDUCIAL-1X2]  121.39,111.23 0 top
FID96  FIDUCIAL1X2  [FIDUCIAL-1X2]  114.02,127.56 0 top
FID97  FIDUCIAL1X2  [FIDUCIAL-1X2]  20.04,147.29 0 top
FID98  FIDUCIAL1X2  [FIDUCIAL-1X2]  12.67,163.63 0 top
FID99  FIDUCIAL1X2  [FIDUCIAL-1X2]  34.52,147.29 0 top
FID100  FIDUCIAL1X2  [FIDUCIAL-1X2]  27.15,163.63 0 top
FID101  FIDUCIAL1X2  [FIDUCIAL-1X2]  49,147.29 0 top
FID102  FIDUCIAL1X2  [FIDUCIAL-1X2]  41.63,163.63 0 top
FID103  FIDUCIAL1X2  [FIDUCIAL-1X2]  63.47,147.29 0 top
FID104  FIDUCIAL1X2  [FIDUCIAL-1X2]  56.11,163.63 0 top
FID105  FIDUCIAL1X2  [FIDUCIAL-1X2]  77.95,147.29 0 top
FID106  FIDUCIAL1X2  [FIDUCIAL-1X2]  70.59,163.63 0 top
FID107  FIDUCIAL1X2  [FIDUCIAL-1X2]  92.43,147.29 0 top
FID108  FIDUCIAL1X2  [FIDUCIAL-1X2]  85.06,163.63 0 top
FID109  FIDUCIAL1X2  [FIDUCIAL-1X2]  106.91,147.29 0 top
FID110  FIDUCIAL1X2  [FIDUCIAL-1X2]  99.54,163.63 0 top
FID111  FIDUCIAL1X2  [FIDUCIAL-1X2]  121.39,147.29 0 top
FID112  FIDUCIAL1X2  [FIDUCIAL-1X2]  114.02,163.63 0 top
FID113  FIDUCIAL1X2  [FIDUCIAL-1X2]  20.04,167.61 0 top
FID114  FIDUCIAL1X2  [FIDUCIAL-1X2]  12.67,183.95 0 top
FID115  FIDUCIAL1X2  [FIDUCIAL-1X2]  34.52,167.61 0 top
FID116  FIDUCIAL1X2  [FIDUCIAL-1X2]  27.15,183.95 0 top
FID117  FIDUCIAL1X2  [FIDUCIAL-1X2]  49,167.61 0 top
FID118  FIDUCIAL1X2  [FIDUCIAL-1X2]  41.63,183.95 0 top
FID119  FIDUCIAL1X2  [FIDUCIAL-1X2]  63.47,167.61 0 top
FID120  FIDUCIAL1X2  [FIDUCIAL-1X2]  56.11,183.95 0 top
FID121  FIDUCIAL1X2  [FIDUCIAL-1X2]  77.95,167.61 0 top
FID122  FIDUCIAL1X2  [FIDUCIAL-1X2]  70.59,183.95 0 top
FID123  FIDUCIAL1X2  [FIDUCIAL-1X2]  92.43,167.61 0 top
FID124  FIDUCIAL1X2  [FIDUCIAL-1X2]  85.06,183.95 0 top
FID125  FIDUCIAL1X2  [FIDUCIAL-1X2]  106.91,167.61 0 top
FID126  FIDUCIAL1X2  [FIDUCIAL-1X2]  99.54,183.95 0 top
FID127  FIDUCIAL1X2  [FIDUCIAL-1X2]  121.39,167.61 0 top
FID128  FIDUCIAL1X2  [FIDUCIAL-1X2]  114.02,183.95 0 top
FID129  FIDUCIAL1X2  [FIDUCIAL-1X2]  20.04,187.93 0 top
FID130  FIDUCIAL1X2  [FIDUCIAL-1X2]  12.67,204.27 0 top
FID131  FIDUCIAL1X2  [FIDUCIAL-1X2]  34.52,187.93 0 top
FID132  FIDUCIAL1X2  [FIDUCIAL-1X2]  27.15,204.27 0 top
FID133  FIDUCIAL1X2  [FIDUCIAL-1X2]  49,187.93 0 top
FID134  FIDUCIAL1X2  [FIDUCIAL-1X2]  41.63,204.27 0 top
FID135  FIDUCIAL1X2  [FIDUCIAL-1X2]  63.47,187.93 0 top
FID136  FIDUCIAL1X2  [FIDUCIAL-1X2]  56.11,204.27 0 top
FID137  FIDUCIAL1X2  [FIDUCIAL-1X2]  77.95,187.93 0 top
FID138  FIDUCIAL1X2  [FIDUCIAL-1X2]  70.59,204.27 0 top
FID139  FIDUCIAL1X2  [FIDUCIAL-1X2]  92.43,187.93 0 top
FID140  FIDUCIAL1X2  [FIDUCIAL-1X2]  85.06,204.27 0 top
FID141  FIDUCIAL1X2  [FIDUCIAL-1X2]  106.91,187.93 0 top
FID142  FIDUCIAL1X2  [FIDUCIAL-1X2]  99.54,204.27 0 top
FID143  FIDUCIAL1X2  [FIDUCIAL-1X2]  121.39,187.93 0 top
FID144  FIDUCIAL1X2  [FIDUCIAL-1X2]  114.02,204.27 0 top
FID145  FIDUCIAL1X2  [FIDUCIAL-1X2]  20.04,208.25 0 top
FID146  FIDUCIAL1X2  [FIDUCIAL-1X2]  12.67,224.59 0 top
FID147  FIDUCIAL1X2  [FIDUCIAL-1X2]  34.52,208.25 0 top
FID148  FIDUCIAL1X2  [FIDUCIAL-1X2]  27.15,224.59 0 top
FID149  FIDUCIAL1X2  [FIDUCIAL-1X2]  49,208.25 0 top
FID150  FIDUCIAL1X2  [FIDUCIAL-1X2]  41.63,224.59 0 top
FID151  FIDUCIAL1X2  [FIDUCIAL-1X2]  63.47,208.25 0 top
FID152  FIDUCIAL1X2  [FIDUCIAL-1X2]  56.11,224.59 0 top
FID153  FIDUCIAL1X2  [FIDUCIAL-1X2]  77.95,208.25 0 top
FID154  FIDUCIAL1X2  [FIDUCIAL-1X2]  70.59,224.59 0 top
FID155  FIDUCIAL1X2  [FIDUCIAL-1X2]  92.43,208.25 0 top
FID156  FIDUCIAL1X2  [FIDUCIAL-1X2]  85.06,224.59 0 top
FID157  FIDUCIAL1X2  [FIDUCIAL-1X2]  106.91,208.25 0 top
FID158  FIDUCIAL1X2  [FIDUCIAL-1X2]  99.54,224.59 0 top
FID159  FIDUCIAL1X2  [FIDUCIAL-1X2]  121.39,208.25 0 top
FID160  FIDUCIAL1X2  [FIDUCIAL-1X2]  114.02,224.59 0 top
FID161  FIDUCIAL1X2  [FIDUCIAL-1X2]  20.04,228.57 0 top
FID162  FIDUCIAL1X2  [FIDUCIAL-1X2]  12.67,244.91 0 top
FID163  FIDUCIAL1X2  [FIDUCIAL-1X2]  34.52,228.57 0 top
FID164  FIDUCIAL1X2  [FIDUCIAL-1X2]  27.15,244.91 0 top
FID165  FIDUCIAL1X2  [FIDUCIAL-1X2]  49,228.57 0 top
FID166  FIDUCIAL1X2  [FIDUCIAL-1X2]  41.63,244.91 0 top
FID167  FIDUCIAL1X2  [FIDUCIAL-1X2]  63.47,228.57 0 top
FID168  FIDUCIAL1X2  [FIDUCIAL-1X2]  56.11,244.91 0 top
FID169  FIDUCIAL1X2  [FIDUCIAL-1X2]  77.95,228.57 0 top
FID170  FIDUCIAL1X2  [FIDUCIAL-1X2]  70.59,244.91 0 top
FID171  FIDUCIAL1X2  [FIDUCIAL-1X2]  92.43,228.57 0 top
FID172  FIDUCIAL1X2  [FIDUCIAL-1X2]  85.06,244.91 0 top
FID173  FIDUCIAL1X2  [FIDUCIAL-1X2]  106.91,228.57 0 top
FID174  FIDUCIAL1X2  [FIDUCIAL-1X2]  99.54,244.91 0 top
FID175  FIDUCIAL1X2  [FIDUCIAL-1X2]  121.39,228.57 0 top
FID176  FIDUCIAL1X2  [FIDUCIAL-1X2]  114.02,244.91 0 top
FID177  FIDUCIAL1X2  [FIDUCIAL-1X2]  20.04,248.89 0 top
FID178  FIDUCIAL1X2  [FIDUCIAL-1X2]  12.67,265.23 0 top
FID179  FIDUCIAL1X2  [FIDUCIAL-1X2]  34.52,248.89 0 top
FID180  FIDUCIAL1X2  [FIDUCIAL-1X2]  27.15,265.23 0 top
FID181  FIDUCIAL1X2  [FIDUCIAL-1X2]  49,248.89 0 top
FID182  FIDUCIAL1X2  [FIDUCIAL-1X2]  41.63,265.23 0 top
FID183  FIDUCIAL1X2  [FIDUCIAL-1X2]  63.47,248.89 0 top
FID184  FIDUCIAL1X2  [FIDUCIAL-1X2]  56.11,265.23 0 top
FID185  FIDUCIAL1X2  [FIDUCIAL-1X2]  77.95,248.89 0 top
FID186  FIDUCIAL1X2  [FIDUCIAL-1X2]  70.59,265.23 0 top
FID187  FIDUCIAL1X2  [FIDUCIAL-1X2]  92.43,248.89 0 top
FID188  FIDUCIAL1X2  [FIDUCIAL-1X2]  85.06,265.23 0 top
FID189  FIDUCIAL1X2  [FIDUCIAL-1X2]  106.91,248.89 0 top
FID190  FIDUCIAL1X2  [FIDUCIAL-1X2]  99.54,265.23 0 top
FID191  FIDUCIAL1X2  [FIDUCIAL-1X2]  121.39,248.89 0 top
FID192  FIDUCIAL1X2  [FIDUCIAL-1X2]  114.02,265.23 0 top
JP1  [2X3_SMT_POSTS]  11.94,12.7 270 top
JP2  [2X3_SMD]  11.94,12.7 270 bottom
JP3  [2X3_SMT_POSTS]  26.42,12.7 270 top
JP4  [2X3_SMD]  26.42,12.7 270 bottom
JP5  [2X3_SMT_POSTS]  40.89,12.7 270 top
JP6  [2X3_SMD]  40.89,12.7 270 bottom
JP7  [2X3_SMT_POSTS]  55.37,12.7 270 top
JP8  [2X3_SMD]  55.37,12.7 270 bottom
JP9  [2X3_SMT_POSTS]  69.85,12.7 270 top
JP10  [2X3_SMD]  69.85,12.7 270 bottom
JP11  [2X3_SMT_POSTS]  84.33,12.7 270 top
JP12  [2X3_SMD]  84.33,12.7 270 bottom
JP13  [2X3_SMT_POSTS]  98.81,12.7 270 top
JP14  [2X3_SMD]  98.81,12.7 270 bottom
JP15  [2X3_SMT_POSTS]  113.28,12.7 270 top
JP16  [2X3_SMD]  113.28,12.7 270 bottom
JP17  [2X3_SMT_POSTS]  11.94,33.02 270 top
JP18  [2X3_SMD]  11.94,33.02 270 bottom
JP19  [2X3_SMT_POSTS]  26.42,33.02 270 top
JP20  [2X3_SMD]  26.42,33.02 270 bottom
JP21  [2X3_SMT_POSTS]  40.89,33.02 270 top
JP22  [2X3_SMD]  40.89,33.02 270 bottom
JP23  [2X3_SMT_POSTS]  55.37,33.02 270 top
JP24  [2X3_SMD]  55.37,33.02 270 bottom
JP25  [2X3_SMT_POSTS]  69.85,33.02 270 top
JP26  [2X3_SMD]  69.85,33.02 270 bottom
JP27  [2X3_SMT_POSTS]  84.33,33.02 270 top
JP28  [2X3_SMD]  84.33,33.02 270 bottom
JP29  [2X3_SMT_POSTS]  98.81,33.02 270 top
JP30  [2X3_SMD]  98.81,33.02 270 bottom
JP31  [2X3_SMT_POSTS]  113.28,33.02 270 top
JP32  [2X3_SMD]  113.28,33.02 270 bottom
JP33  [2X3_SMT_POSTS]  11.94,53.34 270 top
JP34  [2X3_SMD]  11.94,53.34 270 bottom
JP35  [2X3_SMT_POSTS]  26.42,53.34 270 top
JP36  [2X3_SMD]  26.42,53.34 270 bottom
JP37  [2X3_SMT_POSTS]  40.89,53.34 270 top
JP38  [2X3_SMD]  40.89,53.34 270 bottom
JP39  [2X3_SMT_POSTS]  55.37,53.34 270 top
JP40  [2X3_SMD]  55.37,53.34 270 bottom
JP41  [2X3_SMT_POSTS]  69.85,53.34 270 top
JP42  [2X3_SMD]  69.85,53.34 270 bottom
JP43  [2X3_SMT_POSTS]  84.33,53.34 270 top
JP44  [2X3_SMD]  84.33,53.34 270 bottom
JP45  [2X3_SMT_POSTS]  98.81,53.34 270 top
JP46  [2X3_SMD]  98.81,53.34 270 bottom
JP47  [2X3_SMT_POSTS]  113.28,53.34 270 top
JP48  [2X3_SMD]  113.28,53.34 270 bottom
JP49  [2X3_SMT_POSTS]  11.94,73.66 270 top
JP50  [2X3_SMD]  11.94,73.66 270 bottom
JP51  [2X3_SMT_POSTS]  26.42,73.66 270 top
JP52  [2X3_SMD]  26.42,73.66 270 bottom
JP53  [2X3_SMT_POSTS]  40.89,73.66 270 top
JP54  [2X3_SMD]  40.89,73.66 270 bottom
JP55  [2X3_SMT_POSTS]  55.37,73.66 270 top
JP56  [2X3_SMD]  55.37,73.66 270 bottom
JP57  [2X3_SMT_POSTS]  69.85,73.66 270 top
JP58  [2X3_SMD]  69.85,73.66 270 bottom
JP59  [2X3_SMT_POSTS]  84.33,73.66 270 top
JP60  [2X3_SMD]  84.33,73.66 270 bottom
JP61  [2X3_SMT_POSTS]  98.81,73.66 270 top
JP62  [2X3_SMD]  98.81,73.66 270 bottom
JP63  [2X3_SMT_POSTS]  113.28,73.66 270 top
JP64  [2X3_SMD]  113.28,73.66 270 bottom
JP65  [2X3_SMT_POSTS]  11.94,93.98 270 top
JP66  [2X3_SMD]  11.94,93.98 270 bottom
JP67  [2X3_SMT_POSTS]  26.42,93.98 270 top
JP68  [2X3_SMD]  26.42,93.98 270 bottom
JP69  [2X3_SMT_POSTS]  40.89,93.98 270 top
JP70  [2X3_SMD]  40.89,93.98 270 bottom
JP71  [2X3_SMT_POSTS]  55.37,93.98 270 top
JP72  [2X3_SMD]  55.37,93.98 270 bottom
JP73  [2X3_SMT_POSTS]  69.85,93.98 270 top
JP74  [2X3_SMD]  69.85,93.98 270 bottom
JP75  [2X3_SMT_POSTS]  84.33,93.98 270 top
JP76  [2X3_SMD]  84.33,93.98 270 bottom
JP77  [2X3_SMT_POSTS]  98.81,93.98 270 top
JP78  [2X3_SMD]  98.81,93.98 270 bottom
JP79  [2X3_SMT_POSTS]  113.28,93.98 270 top
JP80  [2X3_SMD]  113.28,93.98 270 bottom
JP81  [2X3_SMT_POSTS]  11.94,114.3 270 top
JP82  [2X3_SMD]  11.94,114.3 270 bottom
JP83  [2X3_SMT_POSTS]  26.42,114.3 270 top
JP84  [2X3_SMD]  26.42,114.3 270 bottom
JP85  [2X3_SMT_POSTS]  40.89,114.3 270 top
JP86  [2X3_SMD]  40.89,114.3 270 bottom
JP87  [2X3_SMT_POSTS]  55.37,114.3 270 top
JP88  [2X3_SMD]  55.37,114.3 270 bottom
JP89  [2X3_SMT_POSTS]  69.85,114.3 270 top
JP90  [2X3_SMD]  69.85,114.3 270 bottom
JP91  [2X3_SMT_POSTS]  84.33,114.3 270 top
JP92  [2X3_SMD]  84.33,114.3 270 bottom
JP93  [2X3_SMT_POSTS]  98.81,114.3 270 top
JP94  [2X3_SMD]  98.81,114.3 270 bottom
JP95  [2X3_SMT_POSTS]  113.28,114.3 270 top
JP96  [2X3_SMD]  113.28,114.3 270 bottom
JP97  [2X3_SMT_POSTS]  11.94,150.37 270 top
JP98  [2X3_SMD]  11.94,150.37 270 bottom
JP99  [2X3_SMT_POSTS]  26.42,150.37 270 top
JP100  [2X3_SMD]  26.42,150.37 270 bottom
JP101  [2X3_SMT_POSTS]  40.89,150.37 270 top
JP102  [2X3_SMD]  40.89,150.37 270 bottom
JP103  [2X3_SMT_POSTS]  55.37,150.37 270 top
JP104  [2X3_SMD]  55.37,150.37 270 bottom
JP105  [2X3_SMT_POSTS]  69.85,150.37 270 top
JP106  [2X3_SMD]  69.85,150.37 270 bottom
JP107  [2X3_SMT_POSTS]  84.33,150.37 270 top
JP108  [2X3_SMD]  84.33,150.37 270 bottom
JP109  [2X3_SMT_POSTS]  98.81,150.37 270 top
JP110  [2X3_SMD]  98.81,150.37 270 bottom
JP111  [2X3_SMT_POSTS]  113.28,150.37 270 top
JP112  [2X3_SMD]  113.28,150.37 270 bottom
JP113  [2X3_SMT_POSTS]  11.94,170.69 270 top
JP114  [2X3_SMD]  11.94,170.69 270 bottom
JP115  [2X3_SMT_POSTS]  26.42,170.69 270 top
JP116  [2X3_SMD]  26.42,170.69 270 bottom
JP117  [2X3_SMT_POSTS]  40.89,170.69 270 top
JP118  [2X3_SMD]  40.89,170.69 270 bottom
JP119  [2X3_SMT_POSTS]  55.37,170.69 270 top
JP120  [2X3_SMD]  55.37,170.69 270 bottom
JP121  [2X3_SMT_POSTS]  69.85,170.69 270 top
JP122  [2X3_SMD]  69.85,170.69 270 bottom
JP123  [2X3_SMT_POSTS]  84.33,170.69 270 top
JP124  [2X3_SMD]  84.33,170.69 270 bottom
JP125  [2X3_SMT_POSTS]  98.81,170.69 270 top
JP126  [2X3_SMD]  98.81,170.69 270 bottom
JP127  [2X3_SMT_POSTS]  113.28,170.69 270 top
JP128  [2X3_SMD]  113.28,170.69 270 bottom
JP129  [2X3_SMT_POSTS]  11.94,191.01 270 top
JP130  [2X3_SMD]  11.94,191.01 270 bottom
JP131  [2X3_SMT_POSTS]  26.42,191.01 270 top
JP132  [2X3_SMD]  26.42,191.01 270 bottom
JP133  [2X3_SMT_POSTS]  40.89,191.01 270 top
JP134  [2X3_SMD]  40.89,191.01 270 bottom
JP135  [2X3_SMT_POSTS]  55.37,191.01 270 top
JP136  [2X3_SMD]  55.37,191.01 270 bottom
JP137  [2X3_SMT_POSTS]  69.85,191.01 270 top
JP138  [2X3_SMD]  69.85,191.01 270 bottom
JP139  [2X3_SMT_POSTS]  84.33,191.01 270 top
JP140  [2X3_SMD]  84.33,191.01 270 bottom
JP141  [2X3_SMT_POSTS]  98.81,191.01 270 top
JP142  [2X3_SMD]  98.81,191.01 270 bottom
JP143  [2X3_SMT_POSTS]  113.28,191.01 270 top
JP144  [2X3_SMD]  113.28,191.01 270 bottom
JP145  [2X3_SMT_POSTS]  11.94,211.33 270 top
JP146  [2X3_SMD]  11.94,211.33 270 bottom
JP147  [2X3_SMT_POSTS]  26.42,211.33 270 top
JP148  [2X3_SMD]  26.42,211.33 270 bottom
JP149  [2X3_SMT_POSTS]  40.89,211.33 270 top
JP150  [2X3_SMD]  40.89,211.33 270 bottom
JP151  [2X3_SMT_POSTS]  55.37,211.33 270 top
JP152  [2X3_SMD]  55.37,211.33 270 bottom
JP153  [2X3_SMT_POSTS]  69.85,211.33 270 top
JP154  [2X3_SMD]  69.85,211.33 270 bottom
JP155  [2X3_SMT_POSTS]  84.33,211.33 270 top
JP156  [2X3_SMD]  84.33,211.33 270 bottom
JP157  [2X3_SMT_POSTS]  98.81,211.33 270 top
JP158  [2X3_SMD]  98.81,211.33 270 bottom
JP159  [2X3_SMT_POSTS]  113.28,211.33 270 top
JP160  [2X3_SMD]  113.28,211.33 270 bottom
JP161  [2X3_SMT_POSTS]  11.94,231.65 270 top
JP162  [2X3_SMD]  11.94,231.65 270 bottom
JP163  [2X3_SMT_POSTS]  26.42,231.65 270 top
JP164  [2X3_SMD]  26.42,231.65 270 bottom
JP165  [2X3_SMT_POSTS]  40.89,231.65 270 top
JP166  [2X3_SMD]  40.89,231.65 270 bottom
JP167  [2X3_SMT_POSTS]  55.37,231.65 270 top
JP168  [2X3_SMD]  55.37,231.65 270 bottom
JP169  [2X3_SMT_POSTS]  69.85,231.65 270 top
JP170  [2X3_SMD]  69.85,231.65 270 bottom
JP171  [2X3_SMT_POSTS]  84.33,231.65 270 top
JP172  [2X3_SMD]  84.33,231.65 270 bottom
JP173  [2X3_SMT_POSTS]  98.81,231.65 270 top
JP174  [2X3_SMD]  98.81,231.65 270 bottom
JP175  [2X3_SMT_POSTS]  113.28,231.65 270 top
JP176  [2X3_SMD]  113.28,231.65 270 bottom
JP177  [2X3_SMT_POSTS]  11.94,251.97 270 top
JP178  [2X3_SMD]  11.94,251.97 270 bottom
JP179  [2X3_SMT_POSTS]  26.42,251.97 270 top
JP180  [2X3_SMD]  26.42,251.97 270 bottom
JP181  [2X3_SMT_POSTS]  40.89,251.97 270 top
JP182  [2X3_SMD]  40.89,251.97 270 bottom
JP183  [2X3_SMT_POSTS]  55.37,251.97 270 top
JP184  [2X3_SMD]  55.37,251.97 270 bottom
JP185  [2X3_SMT_POSTS]  69.85,251.97 270 top
JP186  [2X3_SMD]  69.85,251.97 270 bottom
JP187  [2X3_SMT_POSTS]  84.33,251.97 270 top
JP188  [2X3_SMD]  84.33,251.97 270 bottom
JP189  [2X3_SMT_POSTS]  98.81,251.97 270 top
JP190  [2X3_SMD]  98.81,251.97 270 bottom
JP191  [2X3_SMT_POSTS]  113.28,251.97 270 top
JP192  [2X3_SMD]  113.28,251.97 270 bottom
LOGO1  LOGO-SFESK  [SFE-LOGO-FLAME]  7.37,18.92 0 top
LOGO2  OSHW-LOGOS  [OSHW-LOGO-S]  18.29,23.11 0 bottom
LOGO3  LOGO-SFESK  [SFE-LOGO-FLAME]  21.84,18.92 0 top
LOGO4  OSHW-LOGOS  [OSHW-LOGO-S]  32.77,23.11 0 bottom
LOGO5  LOGO-SFESK  [SFE-LOGO-FLAME]  36.32,18.92 0 top
LOGO6  OSHW-LOGOS  [OSHW-LOGO-S]  47.24,23.11 0 bottom
LOGO7  LOGO-SFESK  [SFE-LOGO-FLAME]  50.8,18.92 0 top
LOGO8  OSHW-LOGOS  [OSHW-LOGO-S]  61.72,23.11 0 bottom
LOGO9  LOGO-SFESK  [SFE-LOGO-FLAME]  65.28,18.92 0 top
LOGO10  OSHW-LOGOS  [OSHW-LOGO-S]  76.2,23.11 0 bottom
LOGO11  LOGO-SFESK  [SFE-LOGO-FLAME]  79.76,18.92 0 top
LOGO12  OSHW-LOGOS  [OSHW-LOGO-S]  90.68,23.11 0 bottom
LOGO13  LOGO-SFESK  [SFE-LOGO-FLAME]  94.23,18.92 0 top
LOGO14  OSHW-LOGOS  [OSHW-LOGO-S]  105.16,23.11 0 bottom
LOGO15  LOGO-SFESK  [SFE-LOGO-FLAME]  108.71,18.92 0 top
LOGO16  OSHW-LOGOS  [OSHW-LOGO-S]  119.63,23.11 0 bottom
LOGO17  LOGO-SFESK  [SFE-LOGO-FLAME]  7.37,39.24 0 top
LOGO18  OSHW-LOGOS  [OSHW-LOGO-S]  18.29,43.43 0 bottom
LOGO19  LOGO-SFESK  [SFE-LOGO-FLAME]  21.84,39.24 0 top
LOGO20  OSHW-LOGOS  [OSHW-LOGO-S]  32.77,43.43 0 bottom
LOGO21  LOGO-SFESK  [SFE-LOGO-FLAME]  36.32,39.24 0 top
LOGO22  OSHW-LOGOS  [OSHW-LOGO-S]  47.24,43.43 0 bottom
LOGO23  LOGO-SFESK  [SFE-LOGO-FLAME]  50.8,39.24 0 top
LOGO24  OSHW-LOGOS  [OSHW-LOGO-S]  61.72,43.43 0 bottom
LOGO25  LOGO-SFESK  [SFE-LOGO-FLAME]  65.28,39.24 0 top
LOGO26  OSHW-LOGOS  [OSHW-LOGO-S]  76.2,43.43 0 bottom
LOGO27  LOGO-SFESK  [SFE-LOGO-FLAME]  79.76,39.24 0 top
LOGO28  OSHW-LOGOS  [OSHW-LOGO-S]  90.68,43.43 0 bottom
LOGO29  LOGO-SFESK  [SFE-LOGO-FLAME]  94.23,39.24 0 top
LOGO30  OSHW-LOGOS  [OSHW-LOGO-S]  105.16,43.43 0 bottom
LOGO31  LOGO-SFESK  [SFE-LOGO-FLAME]  108.71,39.24 0 top
LOGO32  OSHW-LOGOS  [OSHW-LOGO-S]  119.63,43.43 0 bottom
LOGO33  LOGO-SFESK  [SFE-LOGO-FLAME]  7.37,59.56 0 top
LOGO34  OSHW-LOGOS  [OSHW-LOGO-S]  18.29,63.75 0 bottom
LOGO35  LOGO-SFESK  [SFE-LOGO-FLAME]  21.84,59.56 0 top
LOGO36  OSHW-LOGOS  [OSHW-LOGO-S]  32.77,63.75 0 bottom
LOGO37  LOGO-SFESK  [SFE-LOGO-FLAME]  36.32,59.56 0 top
LOGO38  OSHW-LOGOS  [OSHW-LOGO-S]  47.24,63.75 0 bottom
LOGO39  LOGO-SFESK  [SFE-LOGO-FLAME]  50.8,59.56 0 top
LOGO40  OSHW-LOGOS  [OSHW-LOGO-S]  61.72,63.75 0 bottom
LOGO41  LOGO-SFESK  [SFE-LOGO-FLAME]  65.28,59.56 0 top
LOGO42  OSHW-LOGOS  [OSHW-LOGO-S]  76.2,63.75 0 bottom
LOGO43  LOGO-SFESK  [SFE-LOGO-FLAME]  79.76,59.56 0 top
LOGO44  OSHW-LOGOS  [OSHW-LOGO-S]  90.68,63.75 0 bottom
LOGO45  LOGO-SFESK  [SFE-LOGO-FLAME]  94.23,59.56 0 top
LOGO46  OSHW-LOGOS  [OSHW-LOGO-S]  105.16,63.75 0 bottom
LOGO47  LOGO-SFESK  [SFE-LOGO-FLAME]  108.71,59.56 0 top
LOGO48  OSHW-LOGOS  [OSHW-LOGO-S]  119.63,63.75 0 bottom
LOGO49  LOGO-SFESK  [SFE-LOGO-FLAME]  7.37,79.88 0 top
LOGO50  OSHW-LOGOS  [OSHW-LOGO-S]  18.29,84.07 0 bottom
LOGO51  LOGO-SFESK  [SFE-LOGO-FLAME]  21.84,79.88 0 top
LOGO52  OSHW-LOGOS  [OSHW-LOGO-S]  32.77,84.07 0 bottom
LOGO53  LOGO-SFESK  [SFE-LOGO-FLAME]  36.32,79.88 0 top
LOGO54  OSHW-LOGOS  [OSHW-LOGO-S]  47.24,84.07 0 bottom
LOGO55  LOGO-SFESK  [SFE-LOGO-FLAME]  50.8,79.88 0 top
LOGO56  OSHW-LOGOS  [OSHW-LOGO-S]  61.72,84.07 0 bottom
LOGO57  LOGO-SFESK  [SFE-LOGO-FLAME]  65.28,79.88 0 top
LOGO58  OSHW-LOGOS  [OSHW-LOGO-S]  76.2,84.07 0 bottom
LOGO59  LOGO-SFESK  [SFE-LOGO-FLAME]  79.76,79.88 0 top
LOGO60  OSHW-LOGOS  [OSHW-LOGO-S]  90.68,84.07 0 bottom
LOGO61  LOGO-SFESK  [SFE-LOGO-FLAME]  94.23,79.88 0 top
LOGO62  OSHW-LOGOS  [OSHW-LOGO-S]  105.16,84.07 0 bottom
LOGO63  LOGO-SFESK  [SFE-LOGO-FLAME]  108.71,79.88 0 top
LOGO64  OSHW-LOGOS  [OSHW-LOGO-S]  119.63,84.07 0 bottom
LOGO65  LOGO-SFESK  [SFE-LOGO-FLAME]  7.37,100.2 0 top
LOGO66  OSHW-LOGOS  [OSHW-LOGO-S]  18.29,104.39 0 bottom
LOGO67  LOGO-SFESK  [SFE-LOGO-FLAME]  21.84,100.2 0 top
LOGO68  OSHW-LOGOS  [OSHW-LOGO-S]  32.77,104.39 0 bottom
LOGO69  LOGO-SFESK  [SFE-LOGO-FLAME]  36.32,100.2 0 top
LOGO70  OSHW-LOGOS  [OSHW-LOGO-S]  47.24,104.39 0 bottom
LOGO71  LOGO-SFESK  [SFE-LOGO-FLAME]  50.8,100.2 0 top
LOGO72  OSHW-LOGOS  [OSHW-LOGO-S]  61.72,104.39 0 bottom
LOGO73  LOGO-SFESK  [SFE-LOGO-FLAME]  65.28,100.2 0 top
LOGO74  OSHW-LOGOS  [OSHW-LOGO-S]  76.2,104.39 0 bottom
LOGO75  LOGO-SFESK  [SFE-LOGO-FLAME]  79.76,100.2 0 top
LOGO76  OSHW-LOGOS  [OSHW-LOGO-S]  90.68,104.39 0 bottom
LOGO77  LOGO-SFESK  [SFE-LOGO-FLAME]  94.23,100.2 0 top
LOGO78  OSHW-LOGOS  [OSHW-LOGO-S]  105.16,104.39 0 bottom
LOGO79  LOGO-SFESK  [SFE-LOGO-FLAME]  108.71,100.2 0 top
LOGO80  OSHW-LOGOS  [OSHW-LOGO-S]  119.63,104.39 0 bottom
LOGO81  LOGO-SFESK  [SFE-LOGO-FLAME]  7.37,120.52 0 top
LOGO82  OSHW-LOGOS  [OSHW-LOGO-S]  18.29,124.71 0 bottom
LOGO83  LOGO-SFESK  [SFE-LOGO-FLAME]  21.84,120.52 0 top
LOGO84  OSHW-LOGOS  [OSHW-LOGO-S]  32.77,124.71 0 bottom
LOGO85  LOGO-SFESK  [SFE-LOGO-FLAME]  36.32,120.52 0 top
LOGO86  OSHW-LOGOS  [OSHW-LOGO-S]  47.24,124.71 0 bottom
LOGO87  LOGO-SFESK  [SFE-LOGO-FLAME]  50.8,120.52 0 top
LOGO88  OSHW-LOGOS  [OSHW-LOGO-S]  61.72,124.71 0 bottom
LOGO89  LOGO-SFESK  [SFE-LOGO-FLAME]  65.28,120.52 0 top
LOGO90  OSHW-LOGOS  [OSHW-LOGO-S]  76.2,124.71 0 bottom
LOGO91  LOGO-SFESK  [SFE-LOGO-FLAME]  79.76,120.52 0 top
LOGO92  OSHW-LOGOS  [OSHW-LOGO-S]  90.68,124.71 0 bottom
LOGO93  LOGO-SFESK  [SFE-LOGO-FLAME]  94.23,120.52 0 top
LOGO94  OSHW-LOGOS  [OSHW-LOGO-S]  105.16,124.71 0 bottom
LOGO95  LOGO-SFESK  [SFE-LOGO-FLAME]  108.71,120.52 0 top
LOGO96  OSHW-LOGOS  [OSHW-LOGO-S]  119.63,124.71 0 bottom
LOGO97  LOGO-SFESK  [SFE-LOGO-FLAME]  7.37,156.59 0 top
LOGO98  OSHW-LOGOS  [OSHW-LOGO-S]  18.29,160.78 0 bottom
LOGO99  LOGO-SFESK  [SFE-LOGO-FLAME]  21.84,156.59 0 top
LOGO100  OSHW-LOGOS  [OSHW-LOGO-S]  32.77,160.78 0 bottom
LOGO101  LOGO-SFESK  [SFE-LOGO-FLAME]  36.32,156.59 0 top
LOGO102  OSHW-LOGOS  [OSHW-LOGO-S]  47.24,160.78 0 bottom
LOGO103  LOGO-SFESK  [SFE-LOGO-FLAME]  50.8,156.59 0 top
LOGO104  OSHW-LOGOS  [OSHW-LOGO-S]  61.72,160.78 0 bottom
LOGO105  LOGO-SFESK  [SFE-LOGO-FLAME]  65.28,156.59 0 top
LOGO106  OSHW-LOGOS  [OSHW-LOGO-S]  76.2,160.78 0 bottom
LOGO107  LOGO-SFESK  [SFE-LOGO-FLAME]  79.76,156.59 0 top
LOGO108  OSHW-LOGOS  [OSHW-LOGO-S]  90.68,160.78 0 bottom
LOGO109  LOGO-SFESK  [SFE-LOGO-FLAME]  94.23,156.59 0 top
LOGO110  OSHW-LOGOS  [OSHW-LOGO-S]  105.16,160.78 0 bottom
LOGO111  LOGO-SFESK  [SFE-LOGO-FLAME]  108.71,156.59 0 top
LOGO112  OSHW-LOGOS  [OSHW-LOGO-S]  119.63,160.78 0 bottom
LOGO113  LOGO-SFESK  [SFE-LOGO-FLAME]  7.37,176.91 0 top
LOGO114  OSHW-LOGOS  [OSHW-LOGO-S]  18.29,181.1 0 bottom
LOGO115  LOGO-SFESK  [SFE-LOGO-FLAME]  21.84,176.91 0 top
LOGO116  OSHW-LOGOS  [OSHW-LOGO-S]  32.77,181.1 0 bottom
LOGO117  LOGO-SFESK  [SFE-LOGO-FLAME]  36.32,176.91 0 top
LOGO118  OSHW-LOGOS  [OSHW-LOGO-S]  47.24,181.1 0 bottom
LOGO119  LOGO-SFESK  [SFE-LOGO-FLAME]  50.8,176.91 0 top
LOGO120  OSHW-LOGOS  [OSHW-LOGO-S]  61.72,181.1 0 bottom
LOGO121  LOGO-SFESK  [SFE-LOGO-FLAME]  65.28,176.91 0 top
LOGO122  OSHW-LOGOS  [OSHW-LOGO-S]  76.2,181.1 0 bottom
LOGO123  LOGO-SFESK  [SFE-LOGO-FLAME]  79.76,176.91 0 top
LOGO124  OSHW-LOGOS  [OSHW-LOGO-S]  90.68,181.1 0 bottom
LOGO125  LOGO-SFESK  [SFE-LOGO-FLAME]  94.23,176.91 0 top
LOGO126  OSHW-LOGOS  [OSHW-LOGO-S]  105.16,181.1 0 bottom
LOGO127  LOGO-SFESK  [SFE-LOGO-FLAME]  108.71,176.91 0 top
LOGO128  OSHW-LOGOS  [OSHW-LOGO-S]  119.63,181.1 0 bottom
LOGO129  LOGO-SFESK  [SFE-LOGO-FLAME]  7.37,197.23 0 top
LOGO130  OSHW-LOGOS  [OSHW-LOGO-S]  18.29,201.42 0 bottom
LOGO131  LOGO-SFESK  [SFE-LOGO-FLAME]  21.84,197.23 0 top
LOGO132  OSHW-LOGOS  [OSHW-LOGO-S]  32.77,201.42 0 bottom
LOGO133  LOGO-SFESK  [SFE-LOGO-FLAME]  36.32,197.23 0 top
LOGO134  OSHW-LOGOS  [OSHW-LOGO-S]  47.24,201.42 0 bottom
LOGO135  LOGO-SFESK  [SFE-LOGO-FLAME]  50.8,197.23 0 top
LOGO136  OSHW-LOGOS  [OSHW-LOGO-S]  61.72,201.42 0 bottom
LOGO137  LOGO-SFESK  [SFE-LOGO-FLAME]  65.28,197.23 0 top
LOGO138  OSHW-LOGOS  [OSHW-LOGO-S]  76.2,201.42 0 bottom
LOGO139  LOGO-SFESK  [SFE-LOGO-FLAME]  79.76,197.23 0 top
LOGO140  OSHW-LOGOS  [OSHW-LOGO-S]  90.68,201.42 0 bottom
LOGO141  LOGO-SFESK  [SFE-LOGO-FLAME]  94.23,197.23 0 top
LOGO142  OSHW-LOGOS  [OSHW-LOGO-S]  105.16,201.42 0 bottom
LOGO143  LOGO-SFESK  [SFE-LOGO-FLAME]  108.71,197.23 0 top
LOGO144  OSHW-LOGOS  [OSHW-LOGO-S]  119.63,201.42 0 bottom
LOGO145  LOGO-SFESK  [SFE-LOGO-FLAME]  7.37,217.55 0 top
LOGO146  OSHW-LOGOS  [OSHW-LOGO-S]  18.29,221.74 0 bottom
LOGO147  LOGO-SFESK  [SFE-LOGO-FLAME]  21.84,217.55 0 top
LOGO148  OSHW-LOGOS  [OSHW-LOGO-S]  32.77,221.74 0 bottom
LOGO149  LOGO-SFESK  [SFE-LOGO-FLAME]  36.32,217.55 0 top
LOGO150  OSHW-LOGOS  [OSHW-LOGO-S]  47.24,221.74 0 bottom
LOGO151  LOGO-SFESK  [SFE-LOGO-FLAME]  50.8,217.55 0 top
LOGO152  OSHW-LOGOS  [OSHW-LOGO-S]  61.72,221.74 0 bottom
LOGO153  LOGO-SFESK  [SFE-LOGO-FLAME]  65.28,217.55 0 top
LOGO154  OSHW-LOGOS  [OSHW-LOGO-S]  76.2,221.74 0 bottom
LOGO155  LOGO-SFESK  [SFE-LOGO-FLAME]  79.76,217.55 0 top
LOGO156  OSHW-LOGOS  [OSHW-LOGO-S]  90.68,221.74 0 bottom
LOGO157  LOGO-SFESK  [SFE-LOGO-FLAME]  94.23,217.55 0 top
LOGO158  OSHW-LOGOS  [OSHW-LOGO-S]  105.16,221.74 0 bottom
LOGO159  LOGO-SFESK  [SFE-LOGO-FLAME]  108.71,217.55 0 top
LOGO160  OSHW-LOGOS  [OSHW-LOGO-S]  119.63,221.74 0 bottom
LOGO161  LOGO-SFESK  [SFE-LOGO-FLAME]  7.37,237.87 0 top
LOGO162  OSHW-LOGOS  [OSHW-LOGO-S]  18.29,242.06 0 bottom
LOGO163  LOGO-SFESK  [SFE-LOGO-FLAME]  21.84,237.87 0 top
LOGO164  OSHW-LOGOS  [OSHW-LOGO-S]  32.77,242.06 0 bottom
LOGO165  LOGO-SFESK  [SFE-LOGO-FLAME]  36.32,237.87 0 top
LOGO166  OSHW-LOGOS  [OSHW-LOGO-S]  47.24,242.06 0 bottom
LOGO167  LOGO-SFESK  [SFE-LOGO-FLAME]  50.8,237.87 0 top
LOGO168  OSHW-LOGOS  [OSHW-LOGO-S]  61.72,242.06 0 bottom
LOGO169  LOGO-SFESK  [SFE-LOGO-FLAME]  65.28,237.87 0 top
LOGO170  OSHW-LOGOS  [OSHW-LOGO-S]  76.2,242.06 0 bottom
LOGO171  LOGO-SFESK  [SFE-LOGO-FLAME]  79.76,237.87 0 top
LOGO172  OSHW-LOGOS  [OSHW-LOGO-S]  90.68,242.06 0 bottom
LOGO173  LOGO-SFESK  [SFE-LOGO-FLAME]  94.23,237.87 0 top
LOGO174  OSHW-LOGOS  [OSHW-LOGO-S]  105.16,242.06 0 bottom
LOGO175  LOGO-SFESK  [SFE-LOGO-FLAME]  108.71,237.87 0 top
LOGO176  OSHW-LOGOS  [OSHW-LOGO-S]  119.63,242.06 0 bottom
LOGO177  LOGO-SFESK  [SFE-LOGO-FLAME]  7.37,258.19 0 top
LOGO178  OSHW-LOGOS  [OSHW-LOGO-S]  18.29,262.38 0 bottom
LOGO179  LOGO-SFESK  [SFE-LOGO-FLAME]  21.84,258.19 0 top
LOGO180  OSHW-LOGOS  [OSHW-LOGO-S]  32.77,262.38 0 bottom
LOGO181  LOGO-SFESK  [SFE-LOGO-FLAME]  36.32,258.19 0 top
LOGO182  OSHW-LOGOS  [OSHW-LOGO-S]  47.24,262.38 0 bottom
LOGO183  LOGO-SFESK  [SFE-LOGO-FLAME]  50.8,258.19 0 top
LOGO184  OSHW-LOGOS  [OSHW-LOGO-S]  61.72,262.38 0 bottom
LOGO185  LOGO-SFESK  [SFE-LOGO-FLAME]  65.28,258.19 0 top
LOGO186  OSHW-LOGOS  [OSHW-LOGO-S]  76.2,262.38 0 bottom
LOGO187  LOGO-SFESK  [SFE-LOGO-FLAME]  79.76,258.19 0 top
LOGO188  OSHW-LOGOS  [OSHW-LOGO-S]  90.68,262.38 0 bottom
LOGO189  LOGO-SFESK  [SFE-LOGO-FLAME]  94.23,258.19 0 top
LOGO190  OSHW-LOGOS  [OSHW-LOGO-S]  105.16,262.38 0 bottom
LOGO191  LOGO-SFESK  [SFE-LOGO-FLAME]  108.71,258.19 0 top
LOGO192  OSHW-LOGOS  [OSHW-LOGO-S]  119.63,262.38 0 bottom
R1  10k  [0603-RES]  15.49,20.7 270 top
R2  1k  [0603-RES]  10.92,24.79 0 top
R3  1k  [0603-RES]  14.35,24.79 180 top
R4  1k  [0603-RES]  9.4,18.29 0 top
R5  1k  [0603-RES]  13.21,18.29 180 top
R6  200k  [0603-RES]  14.04,21.99 270 top
R7  10k  [0603-RES]  29.97,20.7 270 top
R8  1k  [0603-RES]  25.4,24.79 0 top
R9  1k  [0603-RES]  28.83,24.79 180 top
R10  1k  [0603-RES]  23.88,18.29 0 top
R11  1k  [0603-RES]  27.69,18.29 180 top
R12  200k  [0603-RES]  28.52,21.99 270 top
R13  10k  [0603-RES]  44.45,20.7 270 top
R14  1k  [0603-RES]  39.88,24.79 0 top
R15  1k  [0603-RES]  43.31,24.79 180 top
R16  1k  [0603-RES]  38.35,18.29 0 top
R17  1k  [0603-RES]  42.16,18.29 180 top
R18  200k  [0603-RES]  43,21.99 270 top
R19  10k  [0603-RES]  58.93,20.7 270 top
R20  1k  [0603-RES]  54.36,24.79 0 top
R21  1k  [0603-RES]  57.78,24.79 180 top
R22  1k  [0603-RES]  52.83,18.29 0 top
R23  1k  [0603-RES]  56.64,18.29 180 top